# Altium PCB Processing_Unit.PcbDoc
Units mm, origin at the board's own origin, x right, y up, seen from the top; angles counter-clockwise.
Board outline 96.14 x 86.49 mm, 2 copper layers (Top Layer, Bottom Layer); 61 components, 31 nets, 158 pads, 31 vias.
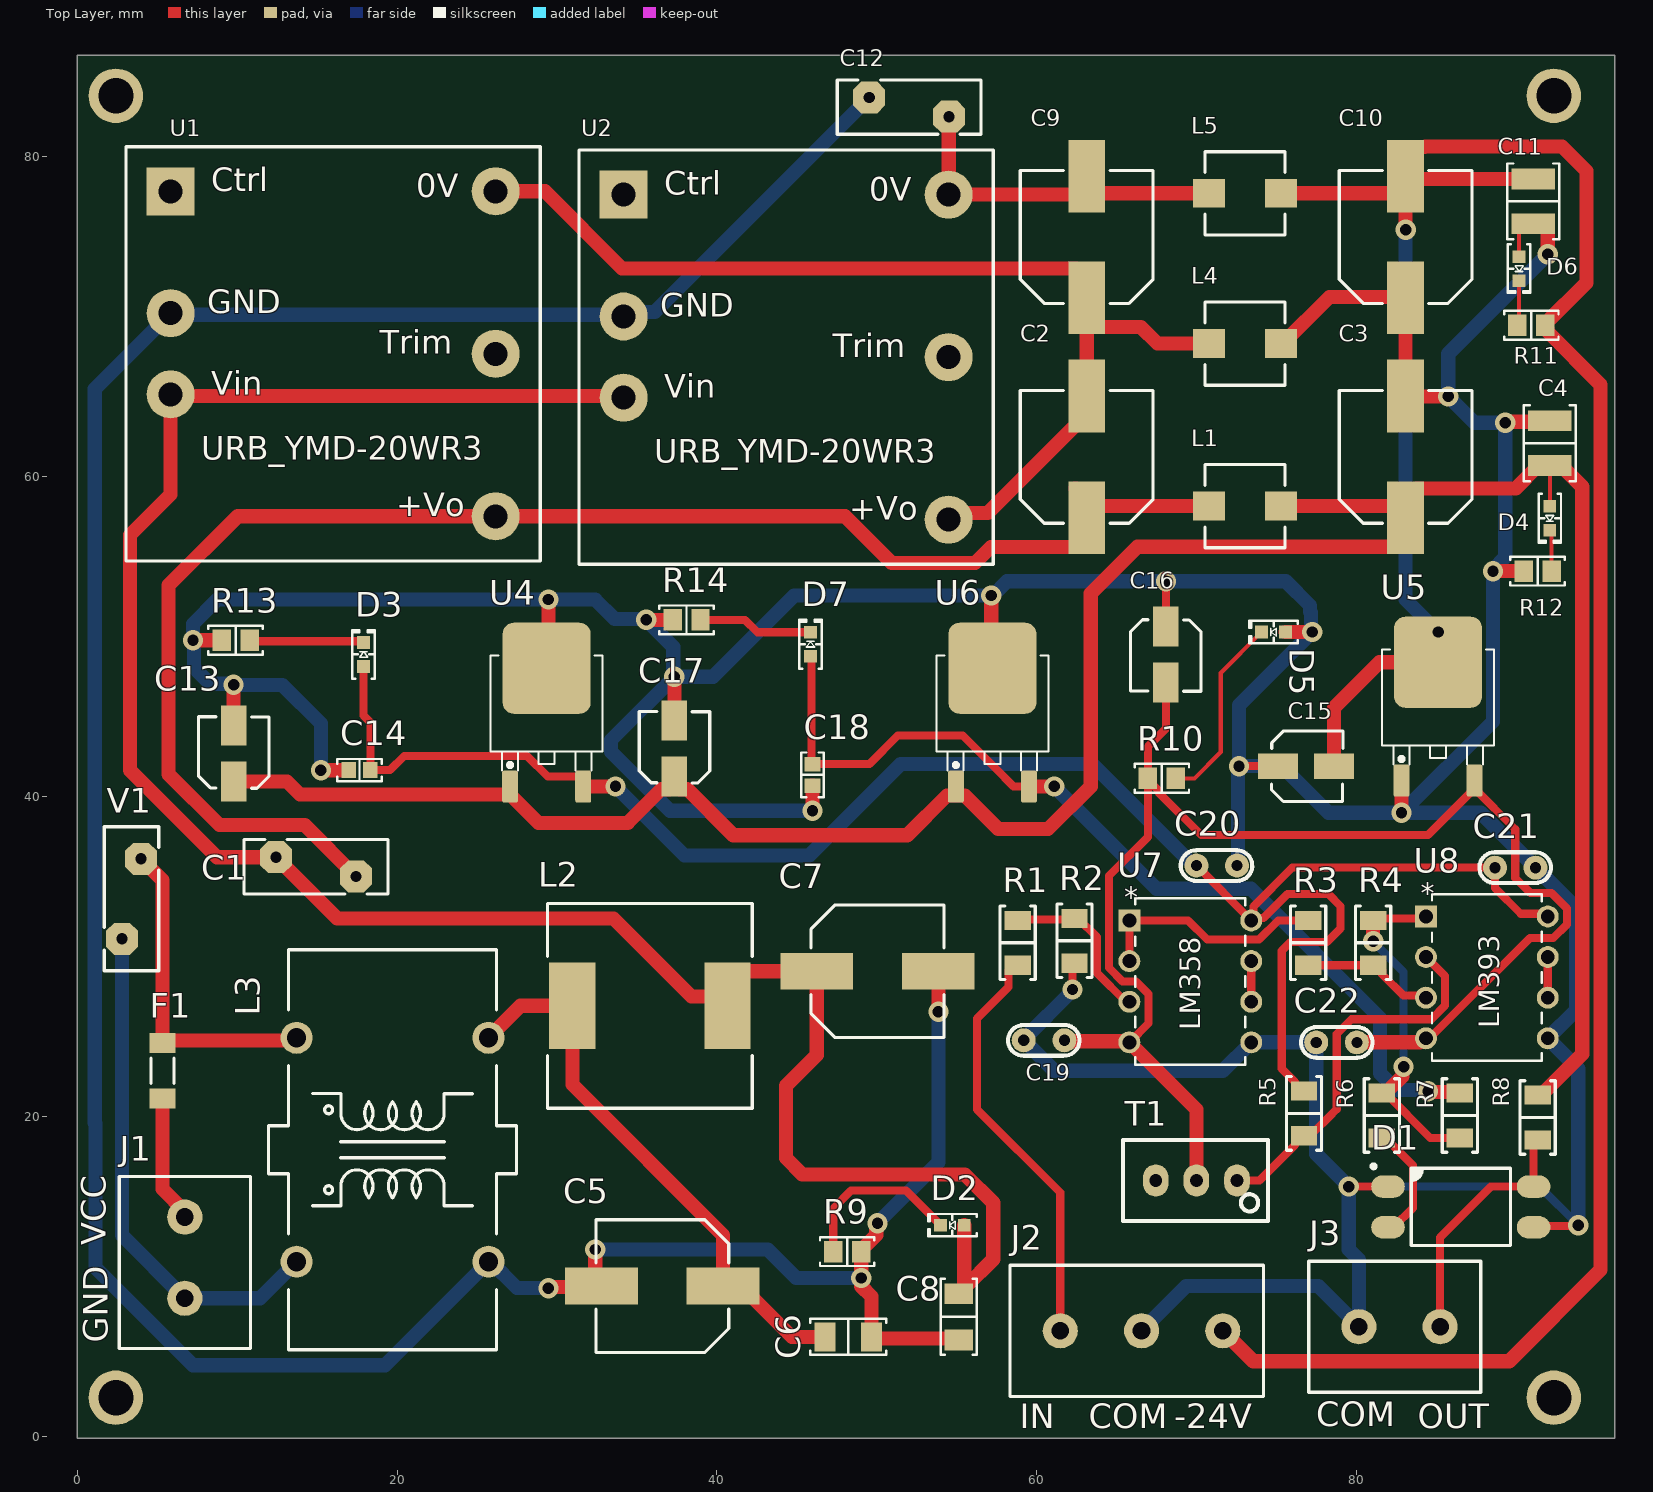
[diagram p0: Top Layer view]
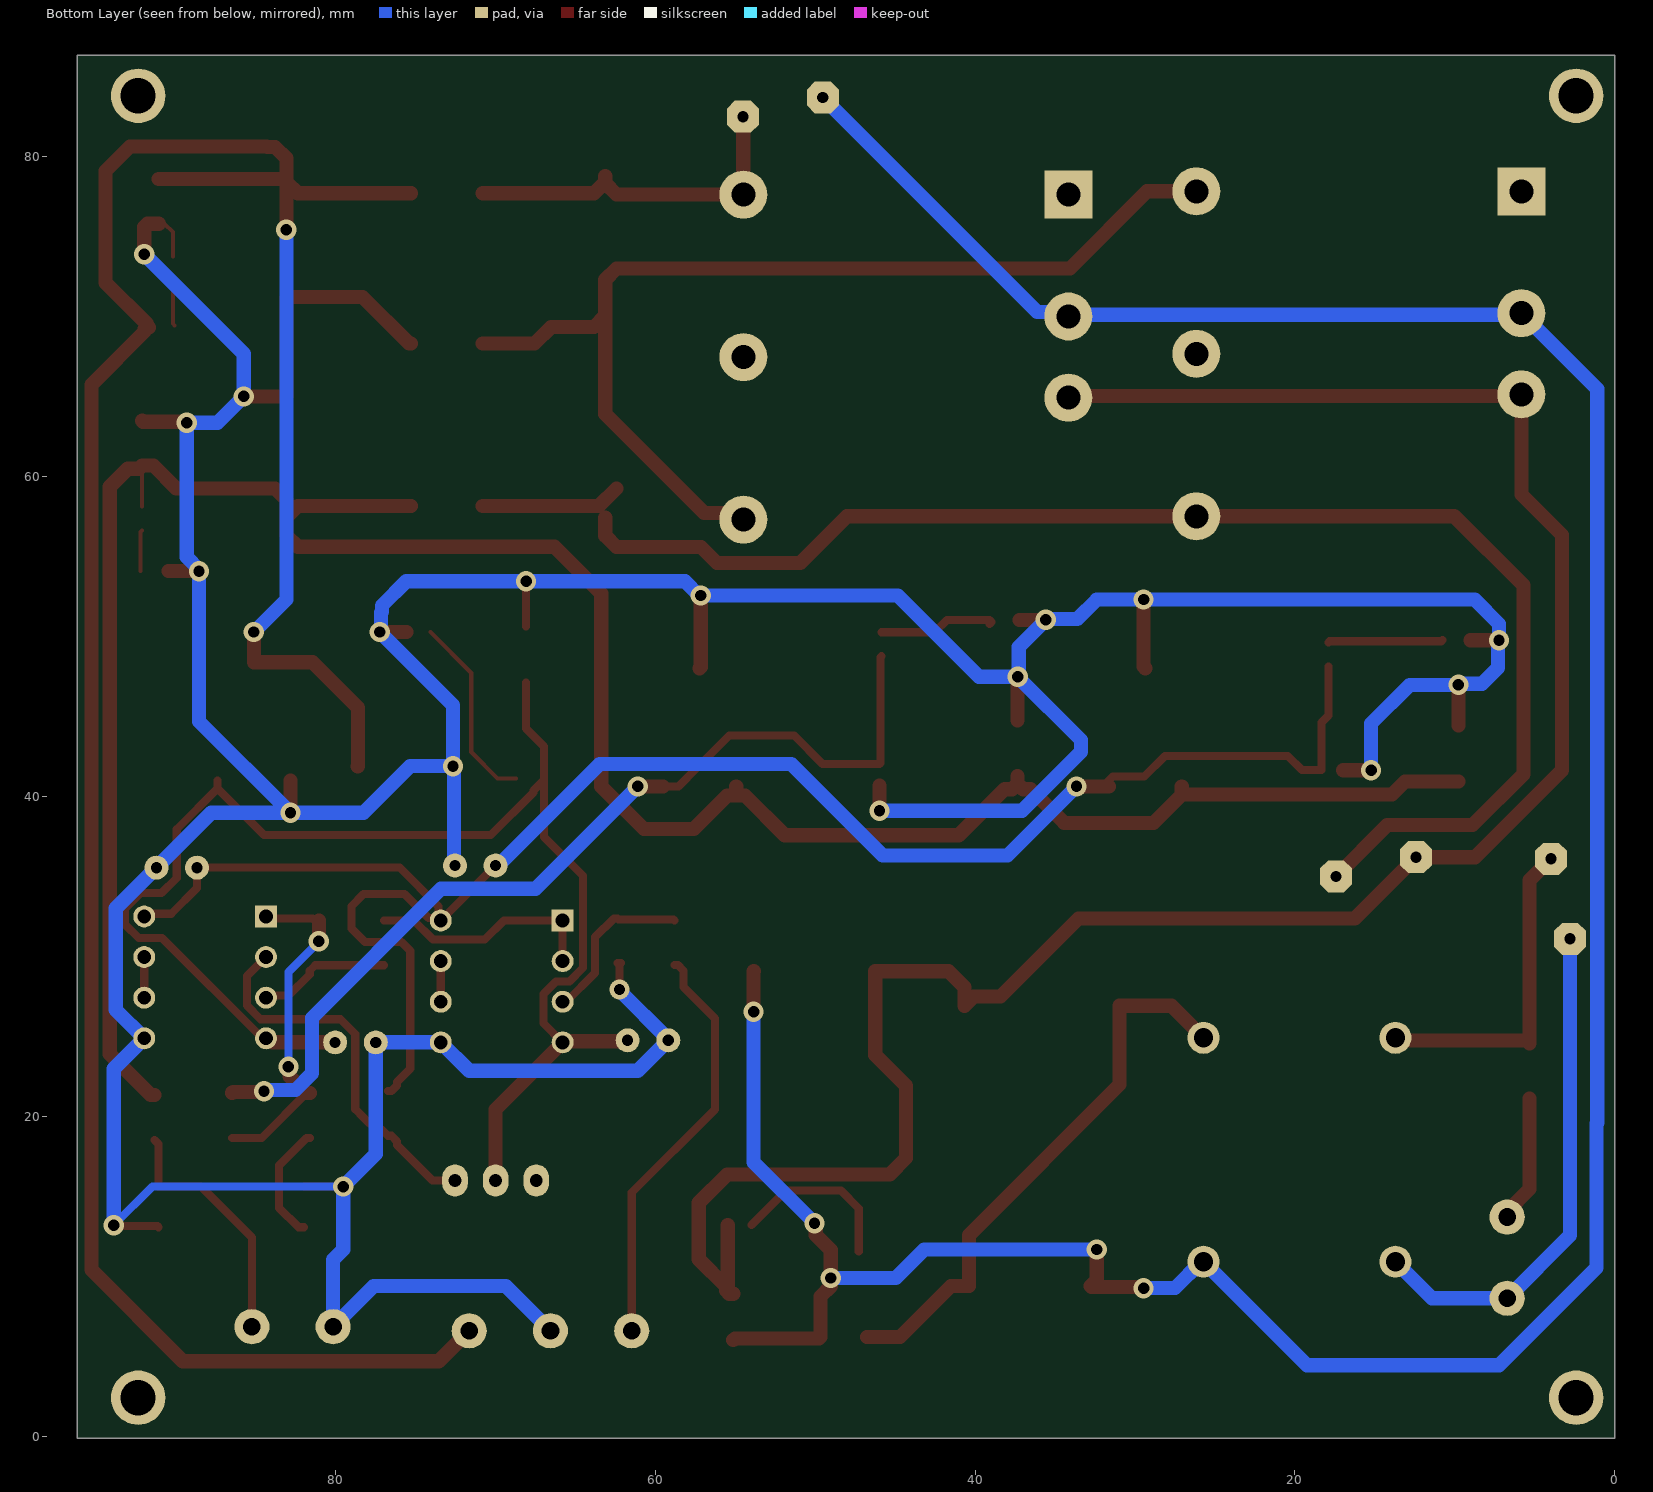
[diagram p1: Bottom Layer view, seen from below]
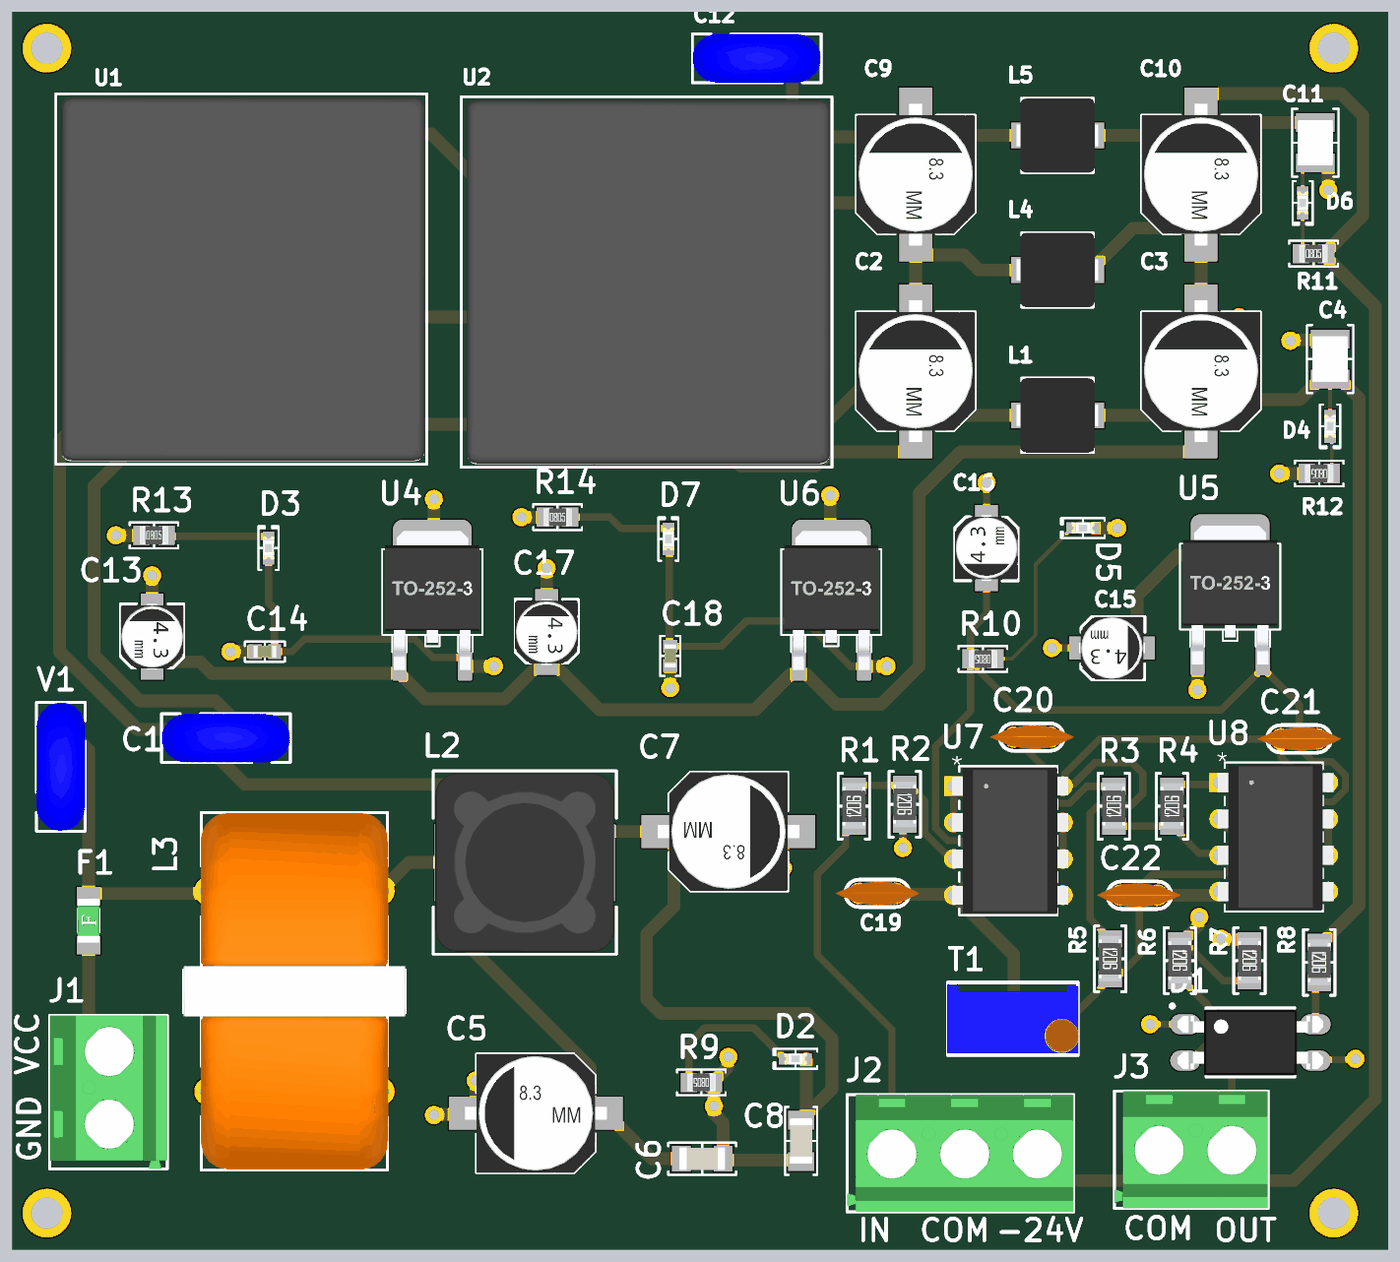
[diagram p2: 3D render of the assembled board from above, using the file's embedded part models]

## Layer stack, top to bottom
Top Solder: solder mask 0.0102, Solder Resist, Dk 3.5
Top Layer: signal copper 0.0356
Dielectric 1: dielectric 0.32, FR-4, Dk 4.8
Bottom Layer: signal copper 0.0356
Bottom Solder: solder mask 0.0102, Solder Resist, Dk 3.5

## Board outline
0,-0.127 96.139,-0.127 96.139,86.36 0,86.36

## Design rules (kind name [scope] priority, off if disabled: settings)
Clearance [All] p1: gap=0.254 ignorepadtopadclearanceinfootprint=FALSE except(0: Arc-Hole Track-Hole SMDPad-Hole THPad-Hole Via-Hole Fill-Hole Poly-Hole Region-Hole Text-Hole)
PolygonConnect [All] p1: connectstyle=Relief reliefconductorwidth=0.254 reliefentries=4 polygonreliefangle="90 Angle" airgapwidth=0.254
RoutingVias [All] p1: holewidth=0.711 width=1.27 viastyle="Through Hole" minholewidth=0.711 minwidth=1.27 maxholewidth=0.711 maxwidth=1.27
SolderMaskExpansion [All] p1: expansion=0.102 istentingtop=FALSE
Width [All] p1: maxlimit=0.889 minlimit=0.254 preferedwidth=0.508 minimp=50.000000 maximp=50.000000 favimp=50.000000
30 further rules are at their usual default settings.

## Classes and differential pairs
component class U_Signal_conditioning: C19 C20 C21 C22 D1 J2 R1 R2 R3 R4 R5 R6 R7 R8 T1 U7 U8
component class U_Power_supply: C1 C2 C3 C4 C5 C6 C7 C8 C9 C10 C11 C12 C13 C14 C15 C16 C17 C18 D2 D3 D4 D5 D6 D7 F1 J1 L1 L2 L3 L4 L5 R9 R10 R11 R12 R13 R14 U1 U2 U4 U5 U6 V1

## Components (designator, comment, footprint, x,y, rotation, side; value= is the part's Value field where it differs from the comment)
C1 "1nF/250VDC" SIOV-S07K11#1 15.113,35.56 r180 top
C2 "68 µF" "CAP ALSMD 8.3MM H10.5MM" 63.119,61.245 r90 top
C3 "4.7uF" "CAP ALSMD 8.3MM H10.5MM" 83.058,61.245 r90 top value=47µF
C4 "4.7 µF" "CAP 1210_3225 - 1MM" 92.075,62.103 r270 top
C5 "100 µF" "CAP ALSMD 8.3MM H10.5MM" 36.586,9.398 r180 top
C6 "4.7 µF" "CAP 1206_3216 - 0.8MM" 48.207,6.223 r180 top
C7 "100 µF" "CAP ALSMD 8.3MM H10.5MM" 50.038,29.083 r0 top
C8 "4.7 µF" "CAP 1206_3216 - 0.8MM" 55.118,7.473 r90 top
C9 "68 µF" "CAP ALSMD 8.3MM H10.5MM" 63.119,74.992 r90 top
C10 "4.7uF" "CAP ALSMD 8.3MM H10.5MM" 83.058,74.992 r90 top value=47µF
C11 "4.7 µF" "CAP 1210_3225 - 1MM" 91.045,77.216 r270 top
C12 "1nF/250VDC" SIOV-S07K11#1 52.197,83.058 r180 top
C13 "3.3 µF" "CAP ALSMD 4.3MM H5.4MM" 9.779,42.7 r90 top
C14 "0.1 µF" "CAP 0603_1608" 17.653,41.656 r0 top
C15 "3.3 µF" "CAP ALSMD 4.3MM H5.4MM" 76.835,41.91 r0 top
C16 "1 µF" "CAP ALSMD 4.3MM H5.4MM" 68.072,48.895 r270 top
C17 "3.3 µF" "CAP ALSMD 4.3MM H5.4MM" 37.338,43.025 r90 top
C18 "0.1 µF" "CAP 0603_1608" 45.974,41.362 r90 top
C19 "103" "tu gom" 60.452,24.765 r0 top
C20 "103" "tu gom" 71.247,35.687 r0 top
C21 "103" "tu gom" 89.916,35.56 r0 top
C22 "103" "tu gom" 78.74,24.638 r180 top
D1 "LTV-817S-TA1" "LITEON LTV-817" 86.509,14.351 r0 top
D2 "Green" "LED 0603_1608 GREEN" 54.719,13.208 r180 top
D3 "Green" "LED 0603_1608 GREEN" 17.907,48.895 r90 top
D4 "Green" "LED 0603_1608 GREEN" 92.075,57.404 r270 top
D5 "Green" "LED 0603_1608 GREEN" 74.803,50.292 r180 top
D6 "Green" "LED 0603_1608 GREEN" 90.156,73.013 r270 top
D7 "Green" "LED 0603_1608 GREEN" 45.847,49.53 r90 top
F1 "3413.0214.22" "FUSE 1206_3216 0.6MM" 5.334,22.86 r90 top
J1 "282837-2" "TE 282837-2" 6.731,11.176 r270 top
J2 "282837-3" "TE 282837-3" 66.548,6.604 r180 top
J3 "282837-2" "TE 282837-2" 82.677,6.858 r180 top
L1 "4.7 µH" "BOURNS SRP5030T" 73.025,58.166 r0 top
L2 "12 µH" "BOURNS SRR1280" 35.814,26.924 r0 top
L3 "SCF20-05-550" "KEMET SCF20-05-550" 19.716,17.922 r90 top
L4 "4.7 µH" "BOURNS SRP5030T" 73.025,68.326 r0 top
L5 "4.7 µH" "BOURNS SRP5030T" 73.025,77.724 r0 top
R1 "220 kOhms" "RES 1206_3216" 58.801,30.864 r90 top
R2 "100 kOhms" "RES 1206_3216" 62.357,30.988 r270 top
R3 "10 kOhms" "RES 1206_3216" 76.962,30.861 r90 top
R4 "100 kOhms" "RES 1206_3216" 81.026,30.861 r90 top
R5 "10 kOhms" "RES 1206_3216" 76.708,20.196 r270 top
R6 "2.2 kOhms" "RES 1206_3216" 81.576,20.066 r270 top
R7 "2.2 kOhms" "RES 1206_3216" 86.445,20.066 r270 top
R8 "3.3 kOhms" "RES 1206_3216" 91.313,19.939 r270 top
R9 "8.2 kOhms" "RES 0805_2012" 48.147,11.557 r180 top
R10 "3.9 kOhms" "RES 0805_2012" 67.818,41.148 r180 top
R11 "7.5 kOhms" "RES 0805_2012" 90.918,69.469 r0 top
R12 "7.5 kOhms" "RES 0805_2012" 91.313,54.102 r180 top
R13 "3.9 kOhms" "RES 0805_2012" 9.906,49.784 r0 top
R14 "3.9 kOhms" "RES 0805_2012" 38.1,51.054 r0 top
T1 "10K" "Bien Tro Vi Chinh Dung" 69.977,16.002 r180 top
U1 "24V" URB_YMD-20WR3 16.002,67.691 r0 top
U2 "24V" URB_YMD-20WR3 44.323,67.483 r0 top
U4 "78M15" TO252 29.355,44.328 r0 top
U5 "79M15" TO252 85.09,44.704 r0 top
U6 "78M05" TO252 57.223,44.328 r0 top
U7 "LM358APE4" P8 65.786,32.258 r0 top
U8 "LM393P" P8 84.328,32.512 r0 top
V1 "THT Varistor" SIOV-S07K11#2 3.394,33.615 r90 top

## Footprints (in the part's own frame and the unit in brackets; to place one, negate y for a bottom-side part, rotate by r counter-clockwise, add the part's x,y. Pads: shape width x height; smd on the part's side, far side on the other; paste and mask are expansions set on the pad)
"Bien Tro Vi Chinh Dung" [mm] "Bien tro vi chinh"
  oval 1.6x2 hole 0.8: 1(-2.54,0) 2(0,0) 3(2.54,0)
  silkscreen extent -4.47,-2.54 4.6,2.54, body extent -4.54,-2.4 4.66,2.4, height 12.02
"BOURNS SRP5030T" [mm] "Precision Wire Wound Inductor, 2-Leads, Body 5.70x5.20mm, IPC Medium Density"
  rect 2x1.8 smd: 1(-2.25,0) 2(2.25,0)
  silkscreen extent -2.5,-2.6 2.5,2.6, body extent -2.85,-2.6 2.85,2.6, height 3
"BOURNS SRR1280" [mm] "Precision Wire Wound Inductor, 2-Leads, Body 12.50x12.50mm, IPC Medium Density"
  rect 2.9x5.4 smd: 1(-4.85,0) 2(4.85,0)
  silkscreen extent -6.4,-6.4 6.4,6.4, body extent -6.25,-6.25 6.25,6.25, height 7.9
"CAP 0603_1608" [mm] "Chip Capacitor, 2-Leads, Body 1.60x0.80mm, IPC Medium Density"
  rect 0.9x1 smd: 1(-0.675,0) 2(0.675,0)
  silkscreen extent -1.4,-0.7 1.4,0.7, body extent -0.8,-0.41 0.8,0.41, height 0.82
"CAP 1206_3216 - 0.8MM" [mm] "Chip Capacitor, 2-Leads, Body 3.25x1.60mm, IPC Medium Density"
  rect 1.3x1.8 smd: 1(-1.45,0) 2(1.45,0)
  silkscreen extent -2.37,-1.12 2.37,1.12, body extent -1.6,-0.8 1.6,0.8, height 0.8
"CAP 1210_3225 - 1MM" [mm] "Chip Capacitor, 2-Leads, Body 3.20x2.50mm, IPC Medium Density"
  rect 1.3x2.7 smd: 1(-1.4,0) 2(1.4,0)
  silkscreen extent -2.37,-1.63 2.37,1.63, body extent -1.6,-1.25 1.6,1.25, height 1
"CAP ALSMD 4.3MM H5.4MM" [mm] "Aluminum Electrolytic Capacitor, Body 4.30x4.30x5.40mm, IPC Low Density"
  rect 2.5x1.6 smd: 1(-1.75,0) 2(1.75,0)
  silkscreen extent -2.17,-2.21 2.3,2.2, body extent -2.3,-2.2 2.3,2.2, height 5.4
"CAP ALSMD 8.3MM H10.5MM" [mm] "Aluminum Electrolytic Capacitor, Body 8.30x8.30x10.50mm, IPC Low Density"
  rect 4.55x2.3 smd: 1(-3.8,0) 2(3.8,0)
  silkscreen extent -4.15,-4.15 4.15,4.15, body extent -4.95,-4.15 4.95,4.15, height 10.5
"FUSE 1206_3216 0.6MM" [mm] "Chip Fuse 1.5A AC 63V DC, 2-Leads, Body 3.10x1.55mm, IPC Medium Densitym"
  rect 1.25x1.65 smd: 1(-1.725,0) 2(1.725,0)
  silkscreen extent -0.8,-0.72 0.8,0.72, body extent -1.55,-0.77 1.55,0.78, height 0.76
"KEMET SCF20-05-550" [mm]
  round 2 hole 1.2: 1(-7,6) 2(-7,-6) 3(7,-6) 4(7,6)
  silkscreen extent -12.5,-7.75 12.5,7.75, body extent -12.5,-7.75 12.5,7.75, height 22.4
"LED 0603_1608 GREEN" [mm] "Chip Diode, 2-Leads, Body 1.60x0.80mm, IPC Medium Density"
  rect 0.8x0.8 smd: 1(-0.75,0) 2(0.75,0)
  silkscreen extent -1.52,-0.7 1.52,0.7, body extent -0.8,-0.4 0.8,0.4, height 0.53
"LITEON LTV-817" [mm] "SOP, 4-Leads, Body 4.60x6.50mm, Pitch 2.54mm, IPC Medium Density"
  oval 2.1x1.4 smd: 1(-4.55,1.27) 2(-4.55,-1.27) 3(4.55,-1.27) 4(4.55,1.27)
  silkscreen extent -5.59,-2.41 3.1,2.66, body extent -5.1,-2.3 5.1,2.3, height 3.85
P8 [mil]
  rect 54x54 / inner round 60 / far side rect 54x54 hole 34 paste-27 mask+0: 1(0,0)
  round 54 / inner round 60 / far side round 54 hole 34 paste-27 mask+0: 2(0,-100) 3(0,-200) 4(0,-300) 5(300,-300) 6(300,-200) 7(300,-100) 8(300,0)
  silkscreen extent 15,-355 285,55, body extent -5,-350 315,50, height 205
"RES 0805_2012" [mm] "Chip Resistor, 2-Leads, Body 2.00x1.25mm, IPC Medium Density"
  rect 1.15x1.35 smd: 1(-0.875,0) 2(0.875,0)
  silkscreen extent -1.7,-0.9 1.7,0.9, body extent -1,-0.62 1,0.63, height 0.6
"RES 1206_3216" [mm] "Chip Resistor, 2-Leads, Body 3.13x1.55mm, IPC Medium Density"
  rect 1.2x1.65 smd: 1(-1.4,0) 2(1.4,0)
  silkscreen extent -2.3,-1.1 2.3,1.1, body extent -1.6,-0.8 1.6,0.8, height 0.6
SIOV-S07K11#1 [mm]
  oct 2x2 hole 0.7: 1(-2.321,0.544) 2(2.679,-0.656)
  silkscreen extent -4.32,-1.76 4.68,1.64, body extent -4.32,-1.76 4.68,1.64, height 9.5
SIOV-S07K11#2 [mm]
  oct 2x2 hole 0.7: 1(-2.5,0.6) 2(2.5,-0.6)
  silkscreen extent -4.5,-1.7 4.5,1.7, body extent -4.5,-1.7 4.5,1.7, height 9.5
"TE 282837-2" [mm] "Wire to Board Terminal Block Horizontal with Board, 2 Postions, Body 10.76x8.2 mm, Pitch 5.08mm"
  round 2.2 hole 1.1: 1(-2.54,0) 2(2.54,0)
  silkscreen extent -5.08,-4.1 5.68,4.1, body extent -5.08,-4.1 5.68,4.1, height 10.3
"TE 282837-3" [mm] "Wire to Board Terminal Block Horizontal with Board, 3 Postions, Body 15.84x8.2mm, Pitch 5.08mm"
  round 2.2 hole 1.1: 1(-5.08,0) 2(0,0) 3(5.08,0)
  silkscreen extent -7.62,-4.1 8.22,4.1, body extent -7.62,-4.1 8.22,4.1, height 10.3
TO252 [mm] "TO252"
  round 0.5 on Mech15: 0(0,0)
  rrect25% 1x2 smd: 1(-2.285,-3.7) 3(2.285,-3.7)
  rrect25% 5.5x5.7 smd: 2(0,3.7)
  silkscreen extent -3.5,-2.7 3.5,4.5, body extent -3.3,-3.95 3.3,5.76, height 2.31
"tu gom" [mm] "Tu gom mini"
  round 1.5 hole 0.7: 1(-1.27,0) 2(1.27,0)
  silkscreen extent -2.25,-0.97 2.22,0.97, body extent -2.92,-0.85 2.92,0.85, height 6.12
URB_YMD-20WR3 [mm]
  rect 3x3 hole 1.5: 1(-10.16,10.16)
  round 3 hole 1.5: 2(-10.16,2.54) 3(-10.16,-2.54) 4(10.16,-10.16) 5(10.16,0) 6(10.16,10.16)
  silkscreen extent -12.95,-12.95 12.95,12.95, body extent -12.57,-12.73 12.83,12.73, height 11.7

## Part data
C1 C12: library part "Y safety capacitor", "pitch 7.5 mm"
C2 C9: library part 865060653009, "CAP ALUM 68UF 20% 50V SMD", Device Package="Radial, Can - SMD", Lifetime @ Temp.="5000 Hrs @ 105°C", manufacturer="Würth Elektronik", Operating Temperature="-55°C ~ 105°C", Ripple Current @ High Frequency="300 mA @ 100 kHz", Ripple Current @ Low Frequency="195 mA @ 120 Hz", Supplier Part Number 1=732-8549-1-ND, Tolerance=±20%, Voltage - Rated="50 V", Applications="General Purpose", Capacitance="68 µF", componentlink1description=Datasheet, componentlink1url=https://katalog.we-online.de/pbs/datasheet/865060653009.pdf, componentlink2description="DigiKey Link", componentlink2url=https://www.digikey.com/en/products/detail/würth-elektronik/865060653009/5728144, Height - Seated (Max)="0.413\" (10.50mm)", Impedance="340 mOhms", lastupdated="4/5/2026 8:53:58 PM", Lifecycle Status=Active, Minimum Order=1, Mounting Type="Surface Mount", Package / Case="Radial, Can - SMD", packaging=TapeAndReel, Part Number=865060653009, Part Status=Active, partid=7468, Polarization=Polar, price=0.36, series=WCAP-ASLL, Size / Dimension="0.315\" Dia (8.00mm)", Supplier 1=DigiKey, Surface Mount Land Size="0.327\" L x 0.327\" W (8.30mm x 8.30mm)"
C3 C10: library part UCX1H470MCS1GS, "CAP ALUM 47UF 20% 50V SMD", Capacitance=47µF, Device Package="Radial, Can - SMD", ESR (Equivalent Series Resistance)=250mOhm, Lifetime @ Temp.="2000 Hrs @ 135°C", manufacturer=Nichicon, Operating Temperature="-40°C ~ 135°C", Ripple Current @ High Frequency="270mA @ 100kHz", Ripple Current @ Low Frequency="135mA @ 120Hz", Supplier Part Number 1=493-13624-1-ND, Tolerance=±20%, Voltage - Rated=50V, Applications="General Purpose", componentlink1description=Datasheet, componentlink1url=http://nichicon-us.com/english/products/pdfs/e-ucx.pdf, componentlink2description="DigiKey Link", componentlink2url=http://digikey.com/product-detail/en/nichicon/UCX1H470MCS1GS/493-13624-1-ND/4695062, Height - Seated (Max)="0.413\" (10.50mm)", lastupdated="9/2/2020 1:25:13 AM", Lifecycle Status=Active, Minimum Order=1, Mounting Type="Surface Mount", Package / Case="Radial, Can - SMD", packaging=TapeAndReel, Part Number=UCX1H470MCS1GS, Part Status=Active, partid=7791, Polarization=Polar, price=0.48, series=UCX, Size / Dimension="0.315\" Dia (8.00mm)", Supplier 1=DigiKey, Surface Mount Land Size="0.327\" L x 0.327\" W (8.30mm x 8.30mm)"
C4 C11: library part CNC6P1X7R2A475K250AE, "CAP 1210 X7R 100V 4.7UF 10% 2.50", Device Package="1210 (3225 Metric)", manufacturer="TDK Corporation", Operating Temperature="-55°C ~ 125°C", Supplier Part Number 1=445-181657-1-ND, Temperature Coefficient=X7R, Tolerance=±10%, Voltage - Rated=100V, Applications="Boardflex Sensitive", Capacitance="4.7 µF", componentlink1description=Datasheet, componentlink1url=https://product.tdk.com/info/en/catalog/datasheets/mlcc_commercial_soft_cnc_en.pdf?ref_disty=digikey, componentlink2description="DigiKey Link", componentlink2url=https://www.digikey.com/en/products/detail/tdk-corporation/CNC6P1X7R2A475K250AE/10240634, Features="Soft Termination", lastupdated="4/6/2026 7:45:52 PM", Lifecycle Status=Active, Minimum Order=1, Mounting Type="Surface Mount, MLCC", Package / Case="1210 (3225 Metric)", packaging=TapeAndReel, Part Number=CNC6P1X7R2A475K250AE, Part Status=Active, partid=23689, price=0.44, series=CNC, Size / Dimension="0.126\" L x 0.098\" W (3.20mm x 2.50mm)", Supplier 1=DigiKey, Thickness (Max)="0.110\" (2.80mm)"
C5 C7: library part UWT1H101MNL1GS, "CAP ALUM 100UF 20% 50V SMD", Device Package="Radial, Can - SMD", Lifetime @ Temp.="1000 Hrs @ 105°C", manufacturer=Nichicon, Operating Temperature="-55°C ~ 105°C", Ratings=AEC-Q200, Ripple Current @ High Frequency="210 mA @ 10 kHz", Ripple Current @ Low Frequency="140 mA @ 120 Hz", Supplier Part Number 1=493-2226-1-ND, Tolerance=±20%, Voltage - Rated="50 V", Applications="General Purpose", Capacitance="100 µF", componentlink1description=Datasheet, componentlink1url=https://products.nichicon.co.jp/en/pdf/XJA043/e-uwt.pdf, componentlink2description="DigiKey Link", componentlink2url=https://www.digikey.com/en/products/detail/nichicon/UWT1H101MNL1GS/589967, Height - Seated (Max)="0.413\" (10.50mm)", lastupdated="4/5/2026 8:53:58 PM", Lifecycle Status=Active, Minimum Order=1, Mounting Type="Surface Mount", Package / Case="Radial, Can - SMD", packaging=TapeAndReel, Part Number=UWT1H101MNL1GS, Part Status=Active, partid=7453, Polarization=Polar, price=0.12, series=UWT, Size / Dimension="0.315\" Dia (8.00mm)", Supplier 1=DigiKey, Surface Mount Land Size="0.327\" L x 0.327\" W (8.30mm x 8.30mm)"
C6 C8: library part GRM31CC72A475KE11K, "CAP CER 4.7UF 100V X7S 1206", Capacitance="1 µF/50V", Device Package="1206 (3216 Metric)", manufacturer="Murata Electronics", Operating Temperature="-55°C ~ 125°C", Supplier Part Number 1=490-GRM31CC72A475KE11KCT-ND, Temperature Coefficient=X7S, Tolerance=±10%, Voltage - Rated=100V, Applications="General Purpose", componentlink1description=Datasheet, componentlink1url=https://search.murata.co.jp/Ceramy/image/img/A01X/G101/ENG/GRM31CC72A475KE11-01.pdf, componentlink2description="DigiKey Link", componentlink2url=https://www.digikey.com/en/products/detail/murata-electronics/GRM31CC72A475KE11K/13904926, lastupdated="4/6/2026 7:36:55 PM", Lifecycle Status=Active, Minimum Order=1, Mounting Type="Surface Mount, MLCC", Package / Case="1206 (3216 Metric)", packaging=TapeAndReel, Part Number=GRM31CC72A475KE11K, Part Status=Active, partid=30045, price=0.19, series=GRM, Size / Dimension="0.126\" L x 0.063\" W (3.20mm x 1.60mm)", Supplier 1=DigiKey, Thickness (Max)="0.075\" (1.90mm)"
C13 C15 C17: library part EEE-FC1V3R3R, "CAP ALUM 3.3UF 20% 35V SMD", Device Package="Radial, Can - SMD", Lifetime @ Temp.="1000 Hrs @ 105°C", manufacturer="Panasonic Electronic Components", Operating Temperature="-40°C ~ 105°C", Ratings=AEC-Q200, Ripple Current @ High Frequency="60 mA @ 100 kHz", Ripple Current @ Low Frequency="45 mA @ 120 Hz", Supplier Part Number 1=PCE4030CT-ND, Tolerance=±20%, Voltage - Rated="35 V", Applications=Automotive, Capacitance="3.3 µF", componentlink1description=Datasheet, componentlink1url=https://industrial.panasonic.com/cdbs/www-data/pdf/RDE0000/ABA0000C1172.pdf, componentlink2description="DigiKey Link", componentlink2url=https://www.digikey.com/en/products/detail/panasonic-electronic-components/EEE-FC1V3R3R/817439, Height - Seated (Max)="0.213\" (5.40mm)", Impedance="3 Ohms", lastupdated="4/5/2026 8:29:52 PM", Lifecycle Status=Active, Minimum Order=1, Mounting Type="Surface Mount", Package / Case="Radial, Can - SMD", packaging=TapeAndReel, Part Number=EEE-FC1V3R3R, Part Status=Active, partid=7059, Polarization=Polar, price=0.11, series=FC, Size / Dimension="0.157\" Dia (4.00mm)", Supplier 1=DigiKey, Surface Mount Land Size="0.169\" L x 0.169\" W (4.30mm x 4.30mm)"
C14 C18: library part C0603C104M5RAC7867, "CAP CER 0.1UF 50V X7R 0603", Device Package="0603 (1608 Metric)", manufacturer=KEMET, Operating Temperature="-55°C ~ 125°C", Supplier Part Number 1=399-C0603C104M5RAC7867CT-ND, Temperature Coefficient=X7R, Tolerance=±20%, Voltage - Rated=50V, Applications="Bypass, Decoupling", Capacitance="0.1 µF", componentlink1description=Datasheet, componentlink1url=https://api.kemet.com/component-edge/download/datasheet/C0603C104M5RACTU.pdf, componentlink2description="DigiKey Link", componentlink2url=https://www.digikey.com/en/products/detail/kemet/C0603C104M5RAC7867/2199782, lastupdated="4/6/2026 7:22:26 PM", Lifecycle Status=Active, Minimum Order=1, Mounting Type="Surface Mount, MLCC", Package / Case="0603 (1608 Metric)", packaging=TapeAndReel, Part Number=C0603C104M5RAC7867, Part Status=Active, partid=35320, price=0.01, series="SMD Comm X7R", Size / Dimension="0.063\" L x 0.031\" W (1.60mm x 0.80mm)", Supplier 1=DigiKey, Thickness (Max)="0.034\" (0.87mm)"
C16: library part EEE-1HA010NR, "CAP ALUM 1UF 20% 50V SMD", Device Package="Radial, Can - SMD", Lifetime @ Temp.="2000 Hrs @ 85°C", manufacturer="Panasonic Electronic Components", Operating Temperature="-40°C ~ 85°C", Ratings=AEC-Q200, Ripple Current @ High Frequency="17 mA @ 10 kHz", Ripple Current @ Low Frequency="10 mA @ 120 Hz", Supplier Part Number 1=PCE4301CT-ND, Tolerance=±20%, Voltage - Rated="50 V", Applications=Automotive, Capacitance="1 µF", componentlink1description=Datasheet, componentlink1url=//media.digikey.com/pdf/Data%20Sheets/Panasonic%20Electronic%20Components/S_Series,Type_V_Rev2018.pdf, componentlink2description="DigiKey Link", componentlink2url=https://www.digikey.com/en/products/detail/panasonic-electronic-components/EEE-1HA010NR/946216, Height - Seated (Max)="0.213\" (5.40mm)", lastupdated="4/5/2026 8:29:53 PM", Lifecycle Status=Active, Minimum Order=1, Mounting Type="Surface Mount", Package / Case="Radial, Can - SMD", packaging=TapeAndReel, Part Number=EEE-1HA010NR, Part Status=Active, partid=7035, Polarization=Bi-Polar, price=0.07, series=S, Size / Dimension="0.157\" Dia (4.00mm)", Supplier 1=DigiKey, Surface Mount Land Size="0.169\" L x 0.169\" W (4.30mm x 4.30mm)"
C19 C20 C21 C22: library part "Tu gom 103 50V", "Cắm", Chung_Loai=Cắm, Don_Vi=Con, Ma_Hang=MH000936, So_Chan=2, Ten_Linh_Kien="Tụ gốm 103 10nF 50V"
D1: "OPTOISOLATR 5KV TRANSISTOR 4-SMD", Current - DC Forward (If) (Max)=50mA, Current Transfer Ratio (Max)="600% @ 5mA", Current Transfer Ratio (Min)="50% @ 5mA", Device Package="4-SMD, Gull Wing", manufacturer="Lite-On Inc.", Operating Temperature="-30°C ~ 110°C", Supplier Device Package=4-SMD, Supplier Part Number 1=160-1893-1-ND, Voltage - Forward (Vf) (Typ)=1.2V, Voltage - Isolation=5000Vrms, Voltage - Output (Max)=35V, componentlink1description=Datasheet, componentlink1url=http://optoelectronics.liteon.com/upload/download/DS-70-96-0016/LTV-8X7%20series%20201610%20.pdf, componentlink2description="DigiKey Link", componentlink2url=http://digikey.com/product-detail/en/lite-on-inc/LTV-817S-TA1/160-1893-1-ND/3306757, Current - Output / Channel=50mA, Input Type=DC, lastupdated="1/12/2020 9:58:48 PM", Lifecycle Status=Active, Minimum Order=1, Mounting Type="Surface Mount", Number of Channels=1, Output Type=Transistor, Package / Case="4-SMD, Gull Wing", packaging=TapeAndReel, Part Number=LTV-817S-TA1, Part Status=Active, price=0.12, Rise / Fall Time (Typ)="4µs, 3µs", series=-, Supplier 1=DigiKey, Vce Saturation (Max)=200mV
D2 D3 D4 D5 D6 D7: library part LSM0603453V, "LED GREEN CLEAR CHIP 0603 SMD", Current - Test=20mA, Device Package="0603 (1608 Metric)", Lens Color=Colorless, manufacturer="Visual Communications Company - VCC", Millicandela Rating=63mcd, Supplier Device Package="Chip LED", Supplier Part Number 1=LSM0603453VCT-ND, Voltage - Forward (Vf) (Typ)=2V, Color=Green, componentlink1description=Datasheet, componentlink1url=https://vcclite.com/wp-content/uploads/wpallimport/files/files/LSM0603453V.pdf, componentlink2description="DigiKey Link", componentlink2url=https://www.digikey.com/en/products/detail/visual-communications-company-vcc/LSM0603453V/9486724, Configuration=Standard, Height (Max)=0.65mm, lastupdated="4/5/2026 20:36:38", Lens Size="1.20mm x 0.80mm", Lens Style="Rectangle with Flat Top", Lens Transparency=Clear, Lifecycle Status=Active, Minimum Order=1, Mounting Type="Surface Mount", Package / Case="0603 (1608 Metric)", packaging=TapeAndReel, Part Number=LSM0603453V, Part Status=Active, partid=579, price=0.09, series=LSM0603, Size / Dimension="1.60mm L x 0.80mm W", Supplier 1=DigiKey, Viewing Angle=120°, Wavelength - Dominant=572nm, Wavelength - Peak=571nm
F1: "FUSE BOARD MNT 630MA 32VAC 63VDC", Breaking Capacity @ Rated Voltage=63A, Current Rating (Amps)=630mA, Device Package="1206 (3216 Metric)", manufacturer="Schurter Inc.", Operating Temperature="-55°C ~ 90°C", Supplier Part Number 1=486-1142-1-ND, Voltage Rating - AC=32V, Voltage Rating - DC=63V, Approval Agency="cURus, VDE", Approvals="cURus, VDE", componentlink1description=Datasheet, componentlink1url=https://us.schurter.com/pdf/english/typ_USI_1206.pdf, componentlink2description="DigiKey Link", componentlink2url=http://digikey.com/product-detail/en/schurter-inc/3413.0214.22/486-1142-1-ND/1522974, Fuse Type="Board Mount (Cartridge Style Excluded)", lastupdated="9/2/2020 1:30:41 AM", Lifecycle Status=Active, Melting I²t=0.076, Minimum Order=1, Mounting Type="Surface Mount", Package / Case="1206 (3216 Metric)", packaging=TapeAndReel, Part Number=3413.0214.22, Part Status=Active, price=0.26, Response Time="Fast Blow", series="USI 1206", Size / Dimension="0.126\" L x 0.063\" W x 0.024\" H (3.20mm x 1.60mm x 0.60mm)", Supplier 1=DigiKey
J1 J3: "TERM BLK 2P SIDE ENT 5.08MM PCB", Color=Green, Current="13.5 A", manufacturer="TE Connectivity AMP Connectors", Supplier Part Number 1=A113320-ND, Voltage="300 V", componentlink1description=Datasheet, componentlink1url=https://www.te.com/commerce/DocumentDelivery/DDEController?Action=srchrtrv&DocNm=282837&DocType=Customer+Drawing&DocLang=English, componentlink2description="DigiKey Link", componentlink2url=https://www.digikey.com/en/products/detail/te-connectivity-amp-connectors/282837-2/2187973, Features="Interlocking (Side)", lastupdated="6/21/2022 3:00:23 PM", Lifecycle Status=Active, Mating Orientation="Horizontal with Board", Minimum Order=1, Mounting Type="Through Hole", Number of Levels=1, packaging=Tray, Part Number=282837-2, Part Status=Active, Pitch="0.200\" (5.08mm)", Positions Per Level=2, price=0.31, series=Buchanan, Supplier 1=DigiKey, Wire Gauge="16-28 AWG", Wire Termination="Screw - Rising Cage Clamp"
J2: "TERM BLK 3P SIDE ENT 5.08MM PCB", Color=Green, Current="13.5 A", manufacturer="TE Connectivity AMP Connectors", Supplier Part Number 1=A113321-ND, Voltage="300 V", componentlink1description=Datasheet, componentlink1url=https://www.te.com/commerce/DocumentDelivery/DDEController?Action=srchrtrv&DocNm=282837&DocType=Customer+Drawing&DocLang=English, componentlink2description="DigiKey Link", componentlink2url=https://www.digikey.com/en/products/detail/te-connectivity-amp-connectors/282837-3/2187974, Features="Interlocking (Side)", lastupdated="6/21/2022 15:00:39", Lifecycle Status=Active, Mating Orientation="Horizontal with Board", Minimum Order=1, Mounting Type="Through Hole", Number of Levels=1, packaging=Tray, Part Number=282837-3, Part Status=Active, Pitch="0.200\" (5.08mm)", Positions Per Level=3, price=0.47, series=Buchanan, Supplier 1=DigiKey, Wire Gauge="16-28 AWG", Wire Termination="Screw - Rising Cage Clamp"
L1 L4 L5: library part SRP5030T-4R7M, "FIXED IND 4.7UH 4.6A 53 MOHM SMD", Current - Saturation=6A, Current Rating (Amps)="4.6 A", DC Resistance (DCR)="53mOhm Max", Device Package=Nonstandard, Inductance Frequency - Test="100 kHz", manufacturer="Bourns Inc.", Operating Temperature="-40°C ~ 125°C", Supplier Part Number 1=SRP5030T-4R7MCT-ND, Tolerance=±20%, componentlink1description=Datasheet, componentlink1url=https://www.bourns.com/docs/Product-Datasheets/SRP5030T.pdf, componentlink2description="DigiKey Link", componentlink2url=https://www.digikey.com/en/products/detail/bourns-inc/SRP5030T-4R7M/3986084, Height - Seated (Max)="0.118\" (3.00mm)", Inductance="4.7 µH", lastupdated="4/5/2026 8:41:42 PM", Lifecycle Status=Active, Material - Core="Iron Powder", Minimum Order=1, Mounting Type="Surface Mount", Package / Case=Nonstandard, packaging=TapeAndReel, Part Number=SRP5030T-4R7M, Part Status=Active, partid=1, price=0.52, series=SRP5030T, Shielding=Shielded, Size / Dimension="0.224\" L x 0.205\" W (5.70mm x 5.20mm)", Supplier 1=DigiKey, Type="Drum Core, Wirewound"
L2: library part SRR1280-120M, "FIXED IND 12UH 5.6A 28 MOHM SMD", Current - Saturation=6.6A, Current Rating (Amps)="5.6 A", DC Resistance (DCR)="28mOhm Max", Device Package=Nonstandard, Frequency - Self Resonant=15MHz, Inductance Frequency - Test="100 kHz", manufacturer="Bourns Inc.", Operating Temperature="-40°C ~ 125°C", Q @ Freq="26 @ 2.52MHz", Supplier Part Number 1=SRR1280-120MCT-ND, Tolerance=±20%, componentlink1description=Datasheet, componentlink1url=https://www.bourns.com/docs/Product-Datasheets/SRR1280.pdf, componentlink2description="DigiKey Link", componentlink2url=https://www.digikey.com/en/products/detail/bourns-inc/SRR1280-120M/1969993, Height - Seated (Max)="0.315\" (8.00mm)", Inductance="12 µH", lastupdated="4/5/2026 8:41:43 PM", Lifecycle Status=Active, Material - Core=Ferrite, Minimum Order=1, Mounting Type="Surface Mount", Package / Case=Nonstandard, packaging=TapeAndReel, Part Number=SRR1280-120M, Part Status=Active, partid=40, price=0.45, series=SRR1280, Shielding=Shielded, Size / Dimension="0.492\" L x 0.492\" W (12.50mm x 12.50mm)", Supplier 1=DigiKey, Type="Drum Core, Wirewound"
L3: "CMC 5.5MH 5A 2LN TH", Current Rating (Max)=5A, DC Resistance (DCR) (Max)=28mOhm, Inductance @ Frequency="5.5mH @ 10kHz", manufacturer=KEMET, Operating Temperature="-25°C ~ 120°C", Package / Case="Vertical, No Base, 4 PC Pin", Supplier Part Number 1=399-10780-ND, Voltage Rating - AC=250V, componentlink1description=Datasheet, componentlink1url=https://api.kemet.com/component-edge/download/datasheet/SCF20-05-550.pdf, componentlink2description="DigiKey Link", componentlink2url=http://digikey.com/product-detail/en/kemet/SCF20-05-550/399-10780-ND/4290846, Filter Type="Power Line", Height (Max)="0.984\" (25.00mm)", lastupdated="8/19/2023 4:18:52 AM", Lifecycle Status=Active, Minimum Order=1, Mounting Type="Through Hole", Number of Lines=2, packaging=Bulk, Part Number=SCF20-05-550, Part Status=Active, price=7.23, series=SC, Size / Dimension="0.984\" L x 0.610\" W (25.00mm x 15.50mm)", Supplier 1=DigiKey, Voltage Rating - DC=250V
R1: library part RT1206BRD07220KL, "RES SMD 220K OHM 0.1% 1/4W 1206", Device Package="1206 (3216 Metric)", manufacturer=Yageo, Operating Temperature="-55°C ~ 155°C", Power (Watts)="0.25W, 1/4W", Supplier Device Package=1206, Supplier Part Number 1=YAG5045CT-ND, Temperature Coefficient=±25ppm/°C, Tolerance=±0.1%, componentlink1description=Datasheet, componentlink1url=https://www.yageo.com/upload/media/product/productsearch/datasheet/rchip/PYu-RT_1-to-0.01_RoHS_L_11.pdf, componentlink2description="DigiKey Link", componentlink2url=https://www.digikey.com/en/products/detail/yageo/RT1206BRD07220KL/1079638, Composition="Thin Film", Height - Seated (Max)="0.026\" (0.65mm)", lastupdated="4/6/2026 8:00:54 PM", Lifecycle Status=Active, Minimum Order=1, Number of Terminations=2, Package / Case="1206 (3216 Metric)", packaging=TapeAndReel, Part Number=RT1206BRD07220KL, Part Status=Active, partid=26865, price=0.09, Resistance="220 kOhms", series=RT, Size / Dimension="0.122\" L x 0.063\" W (3.10mm x 1.60mm)", Supplier 1=DigiKey
R2 R4: library part RNCS1206BKE100K, "RES 100K OHM 0.1% 1/8W 1206", Device Package="1206 (3216 Metric)", manufacturer="Stackpole Electronics Inc", Operating Temperature="-55°C ~ 155°C", Power (Watts)="0.125W, 1/8W", Ratings=AEC-Q200, Supplier Device Package=1206, Supplier Part Number 1=RNCS1206BKE100KCT-ND, Temperature Coefficient=±25ppm/°C, Tolerance=±0.1%, componentlink1description=Datasheet, componentlink1url=https://www.seielect.com/catalog/sei-rncs_rnch.pdf, componentlink2description="DigiKey Link", componentlink2url=https://www.digikey.com/en/products/detail/stackpole-electronics-inc/RNCS1206BKE100K/1800321, Composition="Thin Film", Features="Anti-Corrosive, Automotive AEC-Q200, Moisture Resistant", Height - Seated (Max)="0.026\" (0.65mm)", lastupdated="4/6/2026 8:00:54 PM", Lifecycle Status=Active, Minimum Order=1, Number of Terminations=2, Package / Case="1206 (3216 Metric)", packaging=TapeAndReel, Part Number=RNCS1206BKE100K, Part Status=Active, partid=26854, price=0.08, Resistance="100 kOhms", series=RNCS, Size / Dimension="0.120\" L x 0.061\" W (3.05mm x 1.55mm)", Supplier 1=DigiKey
R3 R5: library part CRG1206F10K, "RES SMD 10K OHM 1% 1/4W 1206", Device Package="1206 (3216 Metric)", manufacturer="TE Connectivity Passive Product", Operating Temperature="-55°C ~ 155°C", Power (Watts)="0.25W, 1/4W", Supplier Device Package=1206, Supplier Part Number 1=A106069CT-ND, Temperature Coefficient=±100ppm/°C, Tolerance=±1%, componentlink1description=Datasheet, componentlink1url=https://www.te.com/commerce/DocumentDelivery/DDEController?Action=srchrtrv&DocNm=1773204&DocType=DS&DocLang=English, componentlink2description="DigiKey Link", componentlink2url=https://www.digikey.com/en/products/detail/te-connectivity-passive-product/CRG1206F10K/2389909, Composition="Thick Film", Height - Seated (Max)="0.026\" (0.65mm)", lastupdated="4/6/2026 8:00:52 PM", Lifecycle Status=Active, Minimum Order=1, Number of Terminations=2, Package / Case="1206 (3216 Metric)", packaging=TapeAndReel, Part Number=CRG1206F10K, Part Status=Active, partid=26989, price=0.01, Resistance="10 kOhms", series="CRG, Neohm", Size / Dimension="0.122\" L x 0.061\" W (3.10mm x 1.55mm)", Supplier 1=DigiKey
R6 R7: library part RT1206BRD072K2L, "RES SMD 2.2K OHM 0.1% 1/4W 1206", Device Package="1206 (3216 Metric)", manufacturer=Yageo, Operating Temperature="-55°C ~ 155°C", Power (Watts)="0.25W, 1/4W", Supplier Device Package=1206, Supplier Part Number 1=YAG5058CT-ND, Temperature Coefficient=±25ppm/°C, Tolerance=±0.1%, componentlink1description=Datasheet, componentlink1url=https://www.yageo.com/upload/media/product/productsearch/datasheet/rchip/PYu-RT_1-to-0.01_RoHS_L_11.pdf, componentlink2description="DigiKey Link", componentlink2url=https://www.digikey.com/en/products/detail/yageo/RT1206BRD072K2L/1079707, Composition="Thin Film", Height - Seated (Max)="0.026\" (0.65mm)", Lifecycle Status=Active, Minimum Order=1, Number of Terminations=2, Package / Case="1206 (3216 Metric)", packaging=TapeAndReel, Part Number=RT1206BRD072K2L, Part Status=Active, partid=26874, price=0.09, Resistance="2.2 kOhms", series=RT, Size / Dimension="0.122\" L x 0.063\" W (3.10mm x 1.60mm)", Supplier 1=DigiKey
  R6: lastupdated="4/6/2026 20:00:54"
  R7: lastupdated="4/6/2026 8:00:54 PM"
R8: library part AC1206JR-073K3L, "RES SMD 3.3K OHM 5% 1/4W 1206", Device Package="1206 (3216 Metric)", manufacturer=Yageo, Operating Temperature="-55°C ~ 155°C", Power (Watts)="0.25W, 1/4W", Ratings=AEC-Q200, Supplier Device Package=1206, Supplier Part Number 1=YAG3958CT-ND, Temperature Coefficient=±100ppm/°C, Tolerance=±5%, componentlink1description=Datasheet, componentlink1url=https://www.yageo.com/upload/media/product/productsearch/datasheet/rchip/PYu-AC_51_RoHS_L_7.pdf, componentlink2description="DigiKey Link", componentlink2url=https://www.digikey.com/en/products/detail/yageo/AC1206JR-073K3L/5897846, Composition="Thick Film", Features="Automotive AEC-Q200, Moisture Resistant", Height - Seated (Max)="0.026\" (0.65mm)", lastupdated="4/6/2026 20:00:53", Lifecycle Status=Active, Minimum Order=1, Number of Terminations=2, Package / Case="1206 (3216 Metric)", packaging=TapeAndReel, Part Number=AC1206JR-073K3L, Part Status=Active, partid=26924, price=0.01, Resistance="3.3 kOhms", series=AC, Size / Dimension="0.122\" L x 0.063\" W (3.10mm x 1.60mm)", Supplier 1=DigiKey
R9: library part ERJ-PB6D8201V, "RES SMD 8.2K OHM 0.5% 1/4W 0805", Device Package="0805 (2012 Metric)", manufacturer="Panasonic Electronic Components", Operating Temperature="-55°C ~ 155°C", Power (Watts)="0.25W, 1/4W", Ratings=AEC-Q200, Supplier Device Package=0805, Supplier Part Number 1=P21123CT-ND, Temperature Coefficient=±50ppm/°C, Tolerance=±0.5%, componentlink1description=Datasheet, componentlink1url=https://industrial.panasonic.com/cdbs/www-data/pdf/RDM0000/AOA0000C328.pdf, componentlink2description="DigiKey Link", componentlink2url=https://www.digikey.com/en/products/detail/panasonic-electronic-components/ERJ-PB6D8201V/6213906, Composition="Thick Film", Features="Automotive AEC-Q200", Height - Seated (Max)="0.028\" (0.70mm)", lastupdated="4/5/2026 20:11:26", Lifecycle Status=Active, Minimum Order=1, Number of Terminations=2, Package / Case="0805 (2012 Metric)", packaging=TapeAndReel, Part Number=ERJ-PB6D8201V, Part Status=Active, partid=27742, price=0.02, Resistance="8.2 kOhms", series=ERJ-PB6, Size / Dimension="0.079\" L x 0.049\" W (2.00mm x 1.25mm)", Supplier 1=DigiKey
R10 R13 R14: library part CRGP0805F3K9, "RES 3.9K OHM 1% 1/3W 0805", Device Package="0805 (2012 Metric)", manufacturer="TE Connectivity Passive Product", Operating Temperature="-55°C ~ 155°C", Power (Watts)="0.333W, 1/3W", Supplier Device Package=0805, Supplier Part Number 1=A130484CT-ND, Temperature Coefficient=±100ppm/°C, Tolerance=±1%, componentlink1description=Datasheet, componentlink1url=https://www.te.com/commerce/DocumentDelivery/DDEController?Action=srchrtrv&DocNm=9-1773463-9&DocType=DS&DocLang=English, componentlink2description="DigiKey Link", componentlink2url=https://www.digikey.com/en/products/detail/te-connectivity-passive-product/CRGP0805F3K9/8577086, Composition="Thick Film", Features="Pulse Withstanding", Height - Seated (Max)="0.026\" (0.65mm)", lastupdated="4/5/2026 20:11:22", Lifecycle Status=Active, Minimum Order=1, Number of Terminations=2, Package / Case="0805 (2012 Metric)", packaging=TapeAndReel, Part Number=CRGP0805F3K9, Part Status=Active, partid=28771, price=0.02, Resistance="3.9 kOhms", series=CRGP, Size / Dimension="0.079\" L x 0.049\" W (2.00mm x 1.25mm)", Supplier 1=DigiKey
R11 R12: library part RN73C2A7K5BTDF, "RES SMD 7.5K OHM 0.1% 1/10W 0805", Device Package="0805 (2012 Metric)", manufacturer="TE Connectivity Passive Product", Operating Temperature="-55°C ~ 155°C", Power (Watts)="0.1W, 1/10W", Supplier Device Package=0805, Supplier Part Number 1=A103510CT-ND, Temperature Coefficient=±10ppm/°C, Tolerance=±0.1%, componentlink1description=Datasheet, componentlink1url=https://www.te.com/commerce/DocumentDelivery/DDEController?Action=srchrtrv&DocNm=1773270&DocType=DS&DocLang=English, componentlink2description="DigiKey Link", componentlink2url=https://www.digikey.com/en/products/detail/te-connectivity-passive-product/RN73C2A7K5BTDF/2373863, Composition="Thin Film", Height - Seated (Max)="0.026\" (0.65mm)", lastupdated="4/5/2026 20:11:25", Lifecycle Status=Active, Minimum Order=1, Number of Terminations=2, Package / Case="0805 (2012 Metric)", packaging=TapeAndReel, Part Number=RN73C2A7K5BTDF, Part Status=Active, partid=27913, price=0.36, Resistance="7.5 kOhms", series="RN73, Holsworthy", Size / Dimension="0.079\" L x 0.049\" W (2.00mm x 1.25mm)", Supplier 1=DigiKey
T1: library part "Bien Tro Tinh Chinh 10K Dung", "Cắm", Chung_Loai=Cắm, Don_Vi=Con, Ma_Hang=MH003232, Ten_Linh_Kien="Biến Trở VR 103-10K 3296W"
U1 U2: library part URB_YMD-20WR3, "Isolated DC-DC Converter"
U4 U5 U6: "SMD"
  U6: Chung_Loai=Dán, Don_Vi=Con, Ma_Hang=MH001917, Ten_Linh_Kien="78M05 TO252"
U7: "Dual, 30-V, 700-kHz operational amplifier 8-PDIP 0 to 70", Manufacturer_Name="Texas Instruments", Copyright="Copyright (C) 2025 Ultra Librarian. All rights reserved.", Manufacturer_Part_Number=LM358APE4, RefDes=RefDes, Type=Type
U8: "Dual differential comparator, commercial grade 8-PDIP 0 to 70", Manufacturer_Name="Texas Instruments", Copyright="Copyright (C) 2026 Ultra Librarian. All rights reserved.", Manufacturer_Part_Number=LM393P, RefDes=RefDes, Type=Type
V1: library part VaristorTHT, Published=19-Feb-2006

## Free pads (board coordinates)
  round 3.4 hole 2.2: 1(2.419,83.82) 2(92.329,83.82) 3(92.329,2.422) 4(2.419,2.422)

## Via types
v1: diameter 1.27, hole 0.711, Top Layer to Bottom Layer, 31 vias

## Nets (pads, with @x,y where several pads share a name; then routed paths per layer and width w, separated by ;. In a path a pad name is that pad's centre, name@x,y a point inside that pad or via, vN(x,y) a via of type N, cw(c..) or ccw(c..) an arc to the next point about the centre after c; other vN are vias at no path point)
+5: C18.2 D7.1 R7.1 U6.3 | length 59.3
  Top Layer w0.508: D7.1 45.91,48.716 45.91,42.1 C18.2 49.53,42.037 51.308,43.815 55.372,43.815 57.404,41.783 58.543,40.644 59.492,40.644 U6.3
  Top Layer w0.889: U6.3 59.513,40.634 61.081,40.634 v1(61.087,40.64) ; v1(84.455,21.59) 84.517,21.528 86.383,21.528 R7.1 R7.1@86.466,21.487
  Bottom Layer w0.889: v1(61.087,40.64) 67.489,34.238 73.383,34.238 81.459,26.163 81.459,22.701 82.496,21.663 84.382,21.663 v1(84.455,21.59)
+15VDC: C14.2 C20.1 C21.1 D3.1 R5.1 U4.3 U7.8 U8.8 | length 115.2
  Top Layer w0.508: D3.1 17.907,45.063 18.328,44.642 C14.2 19.558,41.656 20.447,42.545 28.124,42.545 29.42,41.249 31.394,41.249 31.64,41.003 U4.3 ; C20.1 U7.8 U7.8@73.552,32.404 ; R5.1 76.483,21.596 76.137,21.942 76.137,22.167 75.311,22.993 75.311,30.353 75.86,30.902 78.146,30.902 78.994,31.75 78.994,33.147 78.232,33.909 75.668,33.909 74.182,32.423 73.571,32.423 U7.8@73.552,32.404 ; U8.8 91.783,32.677 90.259,32.677 88.646,34.29 C21.1 75.969,35.56 73.552,33.143 U7.8@73.552,32.404
  Top Layer w0.889: U4.3 31.646,40.634 33.649,40.634 v1(33.655,40.64)
  Bottom Layer w0.889: v1(33.655,40.64) 37.973,36.322 45.774,36.322 51.489,42.037 63.462,42.037 69.812,35.687 C20.1
+24: C3.1 C4.2 C13.1 C17.1 D4.1 L1.2 R8.1 U4.1 U6.1 | length 159.5
  Top Layer w0.254: D4.1 C4.2
  Top Layer w0.889: C13.1 13.117,40.95 13.938,40.128 U4.1@27.07,40.128 ; U4.1 U4.1@27.07,40.128 ; C17.1 C17.1@37.338,40.825 ; U6.1 U6.1@54.938,40.128 ; L1.2 82.352,58.166 C3.1@83.058,57.46 ; R8.1 91.538,21.339 94.107,23.908 94.107,59.371 92.98,60.497 92.281,60.497 C4.2 91.375,60.703 89.948,59.275 83.764,59.275 83.058,58.57 C3.1@83.058,57.46 ; U4.1@27.07,40.128 28.844,38.354 34.417,38.354 36.532,40.469 36.982,40.469 C17.1@37.338,40.825 ; C17.1@37.338,40.825 37.694,40.469 38.144,40.469 41.021,37.592 51.901,37.592 54.382,40.073 54.882,40.073 U6.1@54.938,40.128 ; U6.1@54.938,40.128 54.993,40.073 55.493,40.073 57.593,37.973 60.706,37.973 63.373,40.64 63.373,52.705 66.294,55.626 82.352,55.626 83.058,56.332 C3.1@83.058,57.46
-15VDC: C16.2 C19.2 C22.1 R10.2 T1.2 U5.3 U7.4 U8.4 | length 91.9
  Top Layer w0.508: U7.4 66.98,25.832 66.98,27.672 66.204,28.448 65.368,28.448 64.516,29.3 64.516,35.052 66.943,37.479 R10.2@66.943,41.048 ; C16.2 68.072,44.263 66.943,43.134 R10.2 R10.2@66.943,41.048 ; U8.4 84.554,24.892 90.828,31.166 92.29,31.166 93.142,32.018 93.142,33.006 92.183,33.966 90.875,33.966 89.916,34.925 89.916,37.963 U5.3@87.375,40.504 ; U5.3 U5.3@87.375,40.504 ; R10.2@66.943,41.048 67.61,40.381 67.61,40.263 70.281,37.592 84.463,37.592 U5.3@87.375,40.504
  Top Layer w0.889: C19.2 61.785,24.701 65.722,24.701 U7.4 69.977,20.447 T1.2 ; C22.1 83.943,24.638 84.197,24.892 U8.4
-24: C10.2 C11.1 C15.2 J2.1 L5.2 R11.2 U5.2 | length 170.3
  Top Layer w0.889: J2.1 73.533,4.699 89.535,4.699 95.25,10.414 95.25,65.751 91.923,69.077 91.923,69.239 91.823,69.338 91.662,69.338 R11.2 91.793,69.569 94.361,72.137 94.361,79.121 92.837,80.645 84.284,80.645 84.262,80.622 83.764,80.622 83.058,79.917 C10.2 ; L5.2 82.352,77.724 C10.2@83.058,78.43 ; C15.2@78.599,41.896 C15.2 78.585,45.565 81.424,48.404 U5.2 v1(85.09,50.292) ; v1(83.058,75.438) C10.2@83.058,78.43 ; C11.1 83.234,78.616 C10.2 ; C10.2@83.058,78.43 C10.2
  Bottom Layer w0.889: v1(83.058,75.438) 83.058,52.324 v1(85.09,50.292)
COM: C3.2 C4.1 C10.1 C11.2 C13.2 C14.1 C15.1 C16.1 C17.2 C18.1 C19.1 C20.2 C21.2 C22.2 D1.1 D1.3 D5.1 D6.1 J2.2 J3.2 L4.2 R2.2 R12.2 R13.1 R14.1 U4.2 U5.1 U6.2 U7.5 U8.5 | length 358.9
  Top Layer w0.254: D6.1 90.156,75.293 90.679,75.816 C11.2
  Top Layer w0.508: C19.1 C19.1@59.372,24.955 ; R2.2@62.132,29.588 R2.2 62.23,29.461 v1(62.23,27.94) ; C16.1 v1(68.072,53.467) ; v1(72.644,41.91) C15.1 ; v1(79.502,15.621) D1.1 ; D1.3 91.123,13.144 93.789,13.144 v1(93.853,13.208)
  Top Layer w0.889: v1(7.239,49.784) R13.1 ; C13.2 v1(9.779,46.99) ; v1(15.24,41.656) C14.1 ; U4.2 29.464,48.137 v1(29.464,52.324) ; v1(35.574,51.054) R14.1 ; C17.2 v1(37.338,47.498) ; v1(45.974,39.116) C18.1 ; v1(57.15,52.578) 57.15,48.101 U6.2 ; L4.2 75.375,68.326 78.296,71.247 83.003,71.247 C10.1 C3.2 83.079,65.024 v1(85.725,65.024) ; D5.1 v1(77.216,50.292) ; v1(82.804,38.989) U5.1 ; v1(88.519,54.102) R12.2 ; v1(89.295,63.384) 89.354,63.444 92.016,63.444 C4.1 ; C11.2 91.742,75.816 91.948,75.61 v1(91.948,73.914)
  Bottom Layer w0.508: v1(79.502,15.621) 91.44,15.621 v1(93.853,13.208)
  Bottom Layer w0.889: v1(15.24,41.656) 15.24,44.577 12.827,46.99 v1(9.779,46.99) 9.706,47.063 8.309,47.063 7.312,48.06 7.312,49.711 v1(7.239,49.784) 7.239,50.8 8.763,52.324 v1(29.464,52.324) 32.385,52.324 33.606,51.103 35.525,51.103 v1(35.574,51.054) 37.265,49.363 37.265,47.571 v1(37.338,47.498) ; v1(45.974,39.116) 37.065,39.116 33.379,42.802 33.379,43.539 v1(37.338,47.498) ; v1(62.23,27.94) 62.23,27.877 59.182,24.828 C19.1 61.087,22.86 71.628,22.86 U7.5 C22.2 77.47,17.653 v1(79.502,15.621) 79.502,11.683 80.137,11.048 J3.2 77.597,9.398 69.342,9.398 J2.2 ; C20.2 72.581,35.75 72.581,41.846 v1(72.644,41.91) ; v1(91.948,73.914) 85.725,67.691 v1(85.725,65.024) 87.365,63.384 v1(89.295,63.384) 89.295,54.981 88.519,54.205 v1(88.519,54.102) 88.519,44.704 v1(82.804,38.989) ; v1(93.853,13.208) 93.853,22.987 U8.5 93.726,26.67 93.726,33.02 87.757,38.989 v1(82.804,38.989) ; v1(37.338,47.498) 39.751,47.498 44.831,52.578 v1(57.15,52.578) 57.253,52.578 58.142,53.467 v1(68.072,53.467) 75.565,53.467 77.089,51.943 77.089,51.562 77.143,51.508 77.143,50.365 v1(77.216,50.292) 72.644,45.72 v1(72.644,41.91) ; v1(72.644,41.91) 75.311,41.91 78.232,38.989 v1(82.804,38.989)
IGND: C5.2 C6.1 C7.2 C8.1 C12.2 L3.2 R9.1 U1.2 U2.2 | length 199.4
  Top Layer w0.889: v1(29.464,9.271) 29.527,9.335 32.722,9.335 C5.2 32.385,9.799 v1(32.385,11.684) ; v1(50.038,13.335) 49.965,13.262 49.965,12.6 49.022,11.657 R9.1 v1(49.022,9.906) 49.022,9.385 49.657,8.75 C6.1 49.757,6.123 55.018,6.123 C8.1 ; C7.2 53.848,29.073 v1(53.848,26.543)
  Bottom Layer w0.889: v1(29.464,9.271) 29.449,9.286 27.495,9.286 25.86,10.922 L3.2 19.239,4.445 7.239,4.445 1.143,10.541 1.143,19.558 1.095,19.606 1.095,65.484 U1.2 5.946,70.127 34.059,70.127 U2.2 34.445,70.306 36.11,70.306 C12.2 ; v1(32.385,11.684) 43.18,11.684 44.958,9.906 v1(49.022,9.906) ; v1@49.965,13.408 v1(50.038,13.335) 53.848,17.145 v1(53.848,26.543) v1@53.775,26.47
NC: U8.6 U8.7 | length 2.5
  Top Layer w0.508: U8.6 U8.7
NetC1_1: C1.1 C2.1 L1.1 U1.4 | length 97.2
  Top Layer w0.889: C1.1 14.223,38.227 8.89,38.227 5.715,41.402 5.715,53.213 10.033,57.531 U1.4 48.006,57.531 50.927,54.61 56.134,54.61 57.138,55.614 62.413,55.614 63.119,56.32 C2.1 ; C2.1@62.413,59.275 63.523,58.166 L1.1
NetC2_2: C2.2 C9.1 L4.1 U1.6 U2.4 | length 67.4
  Top Layer w0.889: U1.6 29.242,77.851 34.068,73.025 36.576,73.025 36.579,73.022 62.413,73.022 63.119,72.317 C9.1 C9.1@63.119,70.067 ; U2.4 54.887,57.727 56.926,57.727 63.119,63.92 C2.2 C9.1@63.119,70.067 ; L4.1 67.54,68.326 66.504,69.361 63.825,69.361 C9.1@63.119,70.067
NetC5_1: C5.1 C6.2 L2.1 L3.3 | length 35.2
  Top Layer w0.889: L3.3 27.718,26.924 L2.1 30.964,21.995 40.386,12.573 C5.1 41.511,9.398 44.686,6.223 C6.2
NetC9_2: C9.2 C12.1 L5.1 U2.6 | length 22.3
  Top Layer w0.889: C12.1 54.501,82.496 54.501,77.661 U2.6 62.413,77.643 63.119,78.349 C9.2@63.119,78.43 ; C9.2 C9.2@63.119,78.43 ; L5.1 63.825,77.724 C9.2@63.119,78.43
  Bottom Layer w0.889: U2.6 U2.6@54.501,77.661 ; C12.1@54.501,82.496 C12.1
NetD1_2: D1.2 R6.2 | length 7.4
  Top Layer w0.508: R6.2 81.801,18.666 83.517,16.95 83.517,14.289 82.309,13.081 D1.2
NetD1_4: D1.4 J3.1 R8.2 | length 15.8
  Top Layer w0.508: J3.1 85.217,12.446 88.392,15.621 D1.4 91.059,18.285 R8.2
NetD2_2: D2.2 R9.2 | length 10.7
  Top Layer w0.508: R9.2 47.272,14.252 48.387,15.367 51.81,15.367 D2.2
NetD3_2: D3.2 R13.2 | length 7.2
  Top Layer w0.508: R13.2 10.85,49.715 17.838,49.715 D3.2
NetD4_2: D4.2 R12.1 | length 2.6
  Top Layer w0.254: D4.2 92.188,56.541 R12.1
NetD5_2: D5.2 R10.1 | length 12
  Top Layer w0.254: R10.1 69.85,41.148 71.501,42.799 71.501,47.74 D5.2
NetD6_2: D6.2 R11.1 | length 2.8
  Top Layer w0.254: R11.1 90.156,69.582 D6.2
NetD7_2: D7.2 R14.2 | length 7.4
  Top Layer w0.508: R14.2@39.088,50.8 38.961,50.927 39.088,51.054 41.759,51.054 42.533,50.28 D7.2
NetF1_1: F1.1 J1.1 | length 8
  Top Layer w0.889: F1.1 5.334,15.468 6.731,14.071 J1.1
NetF1_2: F1.2 L3.4 V1.2 | length 20.6
  Top Layer w0.889: V1.2 5.334,34.775 F1.2 5.503,24.754 13.547,24.754 L3.4
NetJ1_2: J1.2 L3.1 V1.1 | length 32
  Bottom Layer w0.889: V1.1 2.794,12.573 J1.2 11.43,8.636 L3.1
NetJ2_3: J2.3 R1.1 | length 26.2
  Top Layer w0.508: R1.1 58.576,29.464 58.23,29.118 58.23,28.099 56.261,26.13 56.261,20.447 61.468,15.24 J2.3
NetR1_2: R1.2 R2.1 U7.3 | length 10.5
  Top Layer w0.508: R1.2 58.863,32.326 62.295,32.326 R2.1 62.582,32.388 63.754,31.216 63.754,28.984 65.56,27.178 U7.3
NetR3_1: R3.1 R4.1 U8.3 | length 8.3
  Top Layer w0.508: R3.1 81.251,29.461 81.597,29.115 81.597,28.89 82.928,27.559 84.201,27.559 U8.3
NetR3_2: R3.2 U7.1 U7.2 | length 14.7
  Top Layer w0.508: U7.2 U7.1 69.462,32.258 70.656,31.064 73.9,31.064 75.094,32.258 76.959,32.258 R3.2
NetR4_2: R4.2 R6.1 R7.2 U8.1 | length 21.5
  Top Layer w0.508: R4.2@81.154,32.132 81.409,32.387 84.203,32.387 U8.1 ; R6.1@81.801,21.466 84.601,18.666 R7.2
  Top Layer w0.889: R4.2 v1(81.026,30.95) v1@81.099,30.877 ; R6.1 81.801,21.466 82.858,22.523 82.858,23.041 v1(82.931,23.114)
  Bottom Layer w0.508: v1(81.026,30.95) 82.931,29.045 v1(82.931,23.114)
NetR5_2: R5.2 T1.1 U8.2 | length 23.9
  Top Layer w0.508: T1.1 73.914,16.002 76.137,18.225 76.137,18.45 76.483,18.796 R5.2 77.054,19.142 77.435,19.142 78.232,19.939 78.752,20.459 78.752,25.159 79.679,26.086 84.67,26.086 85.522,26.938 85.522,28.778 U8.2
NetU7_6: U7.6 U7.7 | length 2.5
  Top Layer w0.508: U7.6 U7.7
VCC: C1.2 C7.1 C8.2 D2.1 L2.2 U1.3 U2.3 | length 141.2
  Top Layer w0.889: U2.3 34.059,65.047 5.946,65.047 U1.3 5.842,58.896 3.302,56.356 3.302,41.656 4.916,40.042 7.128,37.83 8.742,36.216 C1.2 16.265,32.385 33.528,32.385 38.401,27.512 40.076,27.512 L2.2 40.664,28.078 41.67,29.083 C7.1 46.238,23.846 44.323,21.931 44.323,17.399 45.339,16.383 55.499,16.383 57.277,14.605 57.277,11.082 55.574,9.378 55.574,9.128 55.368,8.923 C8.2@55.263,8.923 ; C8.2 C8.2@55.263,8.923 ; D2.1 55.469,9.128 C8.2@55.263,8.923
pads on no net: T1.3 U1.1 U1.5 U2.1 U2.5 U4.0 U5.0 U6.0

## Silkscreen, mask and mechanical layers (free items; w line width, h text height)
Top Overlay:
  text "VCC" at 1.778,11.938 h1.52 r90
  text "GND" at 1.905,5.842 h1.52 r90
  text "COM" at 77.47,0.635 h1.52
  text "IN" at 58.928,0.508 h1.52
  text "COM" at 63.246,0.508 h1.52
  text "-24V" at 68.58,0.508 h1.52
  text "OUT" at 83.82,0.508 h1.52

## Text inside footprints (layer, text, board x,y; h text height)
U1: Top Overlay "Trim" at 18.923,67.183 h2.5; Top Overlay "+Vo" at 19.939,57.023 h2.5; Top Overlay "Vin" at 8.382,64.643 h2.5; Top Overlay "GND" at 8.128,69.723 h2.5; Top Overlay "URB_YMD-20WR3" at 7.747,60.579 h2.5; Top Overlay "Ctrl" at 8.382,77.343 h2.5; Top Overlay "0V" at 21.209,76.962 h2.5
U2: Top Overlay "0V" at 49.53,76.754 h2.5; Top Overlay "Ctrl" at 36.703,77.135 h2.5; Top Overlay "URB_YMD-20WR3" at 36.068,60.371 h2.5; Top Overlay "GND" at 36.449,69.515 h2.5; Top Overlay "Vin" at 36.703,64.435 h2.5; Top Overlay "+Vo" at 48.26,56.815 h2.5; Top Overlay "Trim" at 47.244,66.975 h2.5
U7: Top Overlay "LM358" at 70.231,25.4 h1.27 r90; Top Overlay "*" at 65.468,33.071 h1.27; Mechanical 13 "*" at 66.23,31.623 h1.27
U8: Top Overlay "LM393" at 88.9,25.527 h1.27 r90; Top Overlay "*" at 84.01,33.325 h1.27; Mechanical 13 "*" at 84.772,31.877 h1.27